# Altium PCB PCB1.PcbDoc (part 2 of 3)
Units mil, origin at the board's own origin, x right, y up, seen from the top; angles counter-clockwise.
Board outline 2860 x 1380 mil, 4 copper layers (L1, L2, L3, L4), stack 61.583 mil thick; 101 components, 94 nets, 397 pads, 115 vias.
Unrouted connection lines stored in the file: 102.
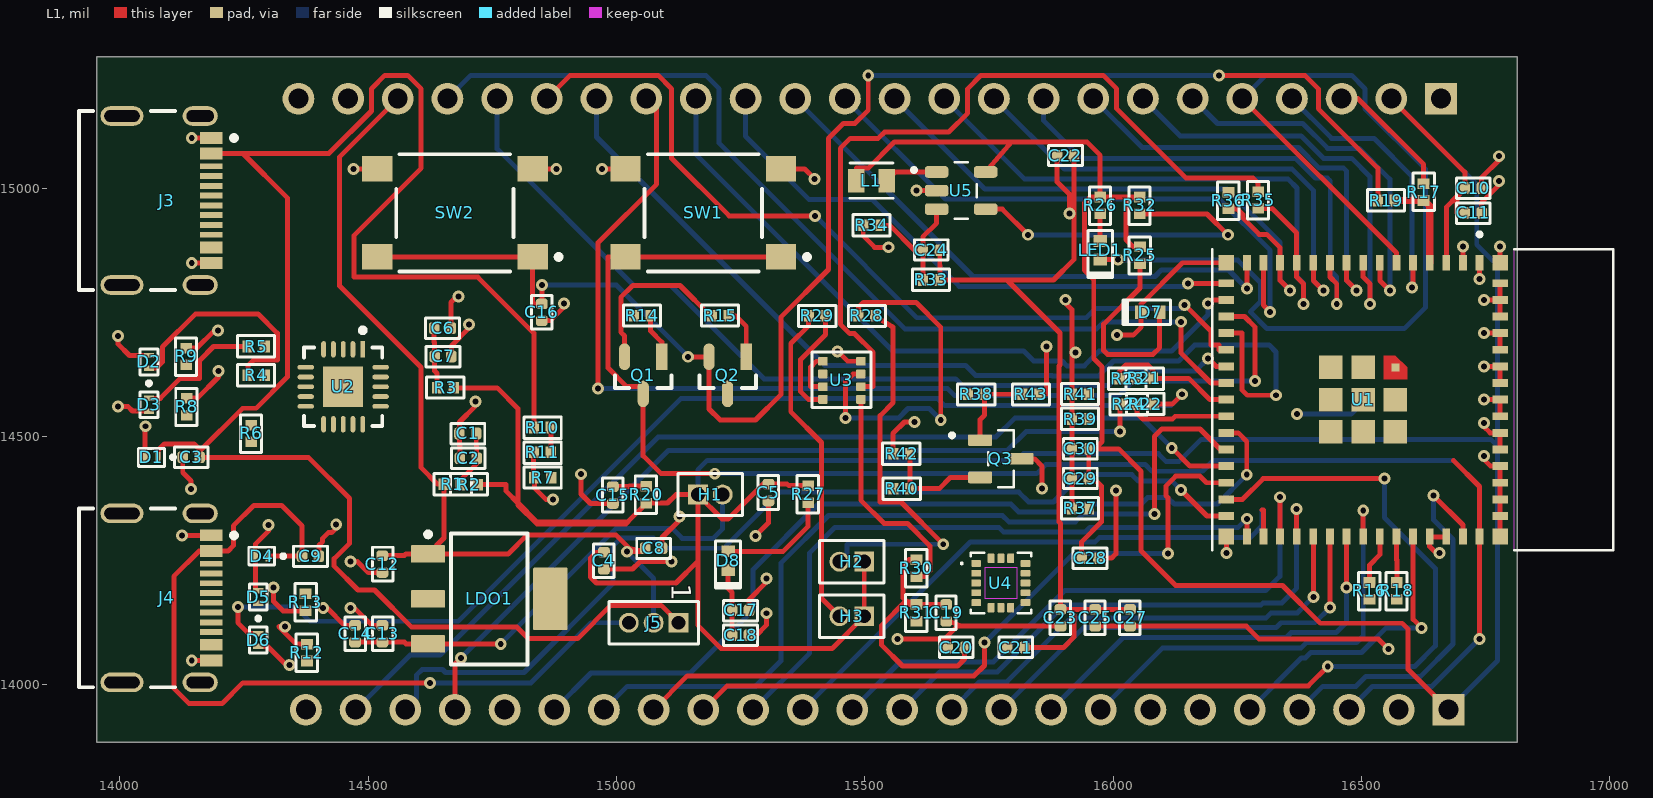
[diagram p0: L1 view]

## Part data (continued)
R10 R29: library part RC0402FR-074K7L, "RES 4.7K OHM 1% 1/16W 0402", Case Code (Imperial)=0402, Case Code (Metric)=1005, LCSC PART Number=C105871, Manufacturer=Yageo, Max Operating Temperature=155°C, Max Power Dissipation=63mW, Min Operating Temperature=-55°C, Power Rating=62.5mW, Resistance Tolerance=1%, Resistor Type="Thick Film", Supplier Part Number=3795218, Temperature Coefficient=100ppm/°C, Voltage Rating=50V, Case/Package=0402, Category="Chip SMD Resistors", ComponentLink1Description=https://datasheet.ciiva.com/7850/1018594-7850022.pdf?src-supplier=Element14, ComponentLink1URL=https://datasheet.ciiva.com/7850/1018594-7850022.pdf?src-supplier=Element14, ComponentLink2Description=https://datasheet.ciiva.com/7850/1018594-7850023.pdf?src-supplier=Element14, ComponentLink2URL=https://datasheet.ciiva.com/7850/1018594-7850023.pdf?src-supplier=Element14, ComponentLink3Description=https://datasheet.ciiva.com/22661/1686128-22661342.pdf?src-supplier=Element14, ComponentLink3URL=https://datasheet.ciiva.com/22661/1686128-22661342.pdf?src-supplier=Element14, Construction=Rectangular, Depth=0.5mm, Features="Moisture Resistant", Lead Free="Lead Free", Length=1mm, Manufacturer Part Number=RC0402FR-074K7L, Military Standard=Not, Number of Terminations=2, Packaging="Tape and Reel", Pins=2, Pricing="10000=0.0007, 50000=0.0007, 200000=0.0007, 500000=0.0007, 1250000=0.0006 (USD)", Reach SVHC Compliant=No, RoHS=Yes, RoHS Compliant=Yes, Series=RC, Stock=3880000, Supplier="Future Electronics", Termination=SMD/SMT, Tolerance=1%, Voltage Rating (AC)=50V, Voltage Rating (DC)=50V, Width=0.5mm
R25 R26 R27 R28: library part RT0402BRD071KL, "RES SMD 1K OHM 0.1% 1/16W 0402", Case Code (Imperial)=0402, Case Code (Metric)=1005, LCSC PART Number=C852624, Manufacturer=Yageo, Max Operating Temperature=155°C, Max Power Dissipation=63mW, Min Operating Temperature=-55°C, Package Quantity=10000, Power Rating=62.5mW, Supplier Part Number=4395265, Temperature Coefficient=25ppm/°C, Tolerance=0.1%, Voltage Rating=50V, Case/Package=0402, Category="Chip SMD Resistors", ComponentLink1Description=https://datasheet.ciiva.com/46635/pyu-rt-1-to-0-05-rohs-l-5-46635179.pdf?src-supplier=Digikey, ComponentLink1URL=https://datasheet.ciiva.com/46635/pyu-rt-1-to-0-05-rohs-l-5-46635179.pdf?src-supplier=Digikey, ComponentLink2Description=https://datasheet.ciiva.com/2582/pyu-rt-1-to-0-05-rohs-l-4-2582219.pdf?src-supplier=Digikey, ComponentLink2URL=https://datasheet.ciiva.com/2582/pyu-rt-1-to-0-05-rohs-l-4-2582219.pdf?src-supplier=Digikey, ComponentLink3Description=https://datasheet.ciiva.com/12837/pyu-rt-1-to-0-05-rohs-l-4-12837237.pdf?src-supplier=Mouser, ComponentLink3URL=https://datasheet.ciiva.com/12837/pyu-rt-1-to-0-05-rohs-l-4-12837237.pdf?src-supplier=Mouser, Features="Moisture Resistant", Height=0.014inch, Lead Free="Lead Free", Length=0.039inch, Manufacturer Part Number=RT0402BRD071KL, Number of Terminations=2, Packaging="Tape and Reel", Pricing="10000=0.0199, 20000=0.0196, 30000=0.0194, 40000=0.0193, 50000=0.0189 (USD)", RoHS=Yes, RoHS Compliant=Yes, Series=RT, Stock=90000, Supplier="Future Electronics", Termination=SMD/SMT, Voltage Rating (DC)=50V, Weight=2.3E-05oz, Width=0.5mm
R32: library part RC0402BR-071ML, "Thick Film Resistors 1 MOhms 1/16W 0402 0.1%", Case/Package=0402, Manufacturer=Yageo, Supplier Part Number=13-RC0402BR-071MLCT-ND, Category="Chip SMD Resistors", ComponentLink1Description=https://datasheet.octopart.com/RC0402BR-071ML-Yageo-datasheet-164759695.pdf?src-supplier=Future+Electronics, ComponentLink1URL=https://datasheet.octopart.com/RC0402BR-071ML-Yageo-datasheet-164759695.pdf?src-supplier=Future+Electronics, Manufacturer Part Number=RC0402BR-071ML, Packaging="Tape and Reel", Parameter 1=C5842802, Pricing="1=0.35, 10=0.138, 100=0.1081, 1000=0.07038, 2500=0.06936, 5000=0.05508 (USD)", RoHS=Yes, RoHS Compliant=Yes, Stock=9912, Supplier=Digikey
R33 R37: library part RT0402BRD0747KL, "RES SMD 47K OHM 0.1% 1/16W 0402", Case Code (Imperial)=0402, Case Code (Metric)=1005, LCSC PART Number=C728561, Manufacturer=Yageo, Max Operating Temperature=155°C, Max Power Dissipation=63mW, Min Operating Temperature=-55°C, Power Rating=62.5mW, Supplier Part Number=4102491, Temperature Coefficient=25ppm/°C, Tolerance=0.1%, Voltage Rating=50V, Case/Package=0402, Category="Chip SMD Resistors", ComponentLink1Description=https://datasheet.ciiva.com/12798/pyu-rt-1-to-0-05-rohs-l-4-12798280.pdf?src-supplier=Mouser, ComponentLink1URL=https://datasheet.ciiva.com/12798/pyu-rt-1-to-0-05-rohs-l-4-12798280.pdf?src-supplier=Mouser, Contact Plating=Tin,Lead, Features="Moisture Resistant", Height=0.014inch, Lead Free="Lead Free", Length=0.039inch, Manufacturer Part Number=RT0402BRD0747KL, Number of Terminations=2, Packaging="Tape and Reel", Pricing="10000=0.0197, 20000=0.0194, 30000=0.0192, 40000=0.0191, 50000=0.0187 (USD)", RoHS=Yes, RoHS Compliant=Yes, Series=RT, Stock=10000, Supplier="Future Electronics", Termination=SMD/SMT, Voltage Rating (DC)=50V, Weight=2.3E-05oz, Width=0.5mm
R34: library part RC0402FR-075K62L, "RES 5.62K OHM 1% 1/16W 0402", Case Code (Imperial)=0402, Case Code (Metric)=1005, LCSC PART Number=C185406, Manufacturer=Yageo, Max Operating Temperature=155°C, Max Power Dissipation=63mW, Min Operating Temperature=-55°C, Power Rating=62.5mW, Supplier Part Number=7854490, Temperature Coefficient=100ppm/°C, Tolerance=1%, Voltage Rating=50V, Case/Package=0402, Category="Chip SMD Resistors", ComponentLink1Description=https://datasheet.ciiva.com/5558/pyu-rc0402-51-rohs-l-6-r-5558205.pdf?src-supplier=Mouser, ComponentLink1URL=https://datasheet.ciiva.com/5558/pyu-rc0402-51-rohs-l-6-r-5558205.pdf?src-supplier=Mouser, ComponentLink2Description=https://datasheet.ciiva.com/16987/pyu-rc0402-51-rohs-l-6-r-16987189.pdf?src-supplier=Future+Electronics, ComponentLink2URL=https://datasheet.ciiva.com/16987/pyu-rc0402-51-rohs-l-6-r-16987189.pdf?src-supplier=Future+Electronics, Construction=Rectangular, Depth=0.5mm, Features="Moisture Resistant", Lead Free="Lead Free", Length=1mm, Manufacturer Part Number=RC0402FR-075K62L, Military Standard=Not, Number of Terminations=2, Packaging="Tape and Reel", Pricing="10000=0.0007, 50000=0.0007, 200000=0.0006, 500000=0.0006, 1250000=0.0006 (USD)", RoHS=Yes, RoHS Compliant=Yes, Series=RC, Stock=1800000, Supplier="Future Electronics", Termination=SMD/SMT, Voltage Rating (DC)=50V
R38 R39: library part RT0402DRE0782RL, "RES SMD 82 OHM 0.5% 1/16W 0402", Case Code (Imperial)=0402, Case Code (Metric)=1005, LCSC PART Number=C854049, Manufacturer=Yageo, Max Operating Temperature=155°C, Max Power Dissipation=63mW, Min Operating Temperature=-55°C, Package Quantity=1, Supplier Part Number=311-82UTR-ND, Temperature Coefficient=50ppm/°C, Tolerance=0.5%, Voltage Rating (DC)=50V, Case/Package=0402, Category="Chip SMD Resistors", ComponentLink1Description=https://www.yageo.com/upload/media/product/productsearch/datasheet/rchip/PYu-RT_1-to-0.01_RoHS_L_12.pdf?src-supplier=Digikey, ComponentLink1URL=https://www.yageo.com/upload/media/product/productsearch/datasheet/rchip/PYu-RT_1-to-0.01_RoHS_L_12.pdf?src-supplier=Digikey, ComponentLink2Description=http://www.yageo.com/documents/recent/PYu-RT_1-to-0.01_RoHS_L_8.pdf?src-supplier=Digikey, ComponentLink2URL=http://www.yageo.com/documents/recent/PYu-RT_1-to-0.01_RoHS_L_8.pdf?src-supplier=Digikey, Features="Moisture Resistant", Height=0.014inch, Lead Free="Lead Free", Length=0.039inch, Manufacturer Part Number=RT0402DRE0782RL, Number of Terminations=2, Packaging="Cut Tape", Pricing="10000=0.0203 (USD)", RoHS=Yes, RoHS Compliant=Yes, Series=RT, Supplier=Digikey, Width=0.02inch
R40: library part RC0402FR-7W100RL, "RES 100 OHM 1% 1/8W 0402", Case/Package=343Case, LCSC PART Number=C606168, Manufacturer=Yageo, Supplier Part Number=13-RC0402FR-7W100RLCT-ND, Category="Chip SMD Resistors", ComponentLink1Description=https://datasheet.octopart.com/RC0402FR-7W100RL-Yageo-datasheet-164759695.pdf?src-supplier=Future+Electronics, ComponentLink1URL=https://datasheet.octopart.com/RC0402FR-7W100RL-Yageo-datasheet-164759695.pdf?src-supplier=Future+Electronics, Manufacturer Part Number=RC0402FR-7W100RL, Packaging=10Packaging, Pricing="1=0.1, 10=0.013, 100=0.0071, 1000=0.00408, 2500=0.00306 (USD)", RoHS=Yes, RoHS Compliant=Yes, Stock=5227, Supplier=Digikey
R41: library part CRGCQ0402F22K, "RES 22K OHM 1% 1/16W 0402", Case/Package=0402, LCSC PART Number=C2073567, Manufacturer="TE Connectivity", Max Operating Temperature=155°C, Max Power Dissipation=63mW, Min Operating Temperature=-55°C, Operating Supply Voltage=50V, Power Rating=62.5mW, Ratings=AEC-Q200, Supplier Part Number=73AC8868, Temperature Coefficient=100ppm/°C, Tolerance=1%, Category="Chip SMD Resistors", ComponentLink1Description=http://datasheet.octopart.com/CRGCQ0402F22K-TE-Connectivity-datasheet-114679081.pdf?src-supplier=Digikey, ComponentLink1URL=http://datasheet.octopart.com/CRGCQ0402F22K-TE-Connectivity-datasheet-114679081.pdf?src-supplier=Digikey, ComponentLink2Description=https://4donline.ihs.com/images/VipMasterIC/IC/TYEL/TYEL-S-A0004929575/TYEL-S-A0004929575-1.pdf?hkey=52A5661711E402568146F3353EA87419&src-supplier=Farnell, ComponentLink2URL=https://4donline.ihs.com/images/VipMasterIC/IC/TYEL/TYEL-S-A0004929575/TYEL-S-A0004929575-1.pdf?hkey=52A5661711E402568146F3353EA87419&src-supplier=Farnell, ComponentLink3Description=http://datasheet.octopart.com/CRGCQ0402F22K-TE-Connectivity-datasheet-114679081.pdf?src-supplier=Avnet, ComponentLink3URL=http://datasheet.octopart.com/CRGCQ0402F22K-TE-Connectivity-datasheet-114679081.pdf?src-supplier=Avnet, ComponentLink4Description=http://datasheet.octopart.com/CRGCQ0402F22K-TE-Connectivity-datasheet-114679081.pdf?src-supplier=Mouser, ComponentLink4URL=http://datasheet.octopart.com/CRGCQ0402F22K-TE-Connectivity-datasheet-114679081.pdf?src-supplier=Mouser, ComponentLink5Description=http://datasheet.octopart.com/CRGCQ0402F22K-TE-Connectivity-datasheet-114679081.pdf?src-supplier=Onlinecomponents.com, ComponentLink5URL=http://datasheet.octopart.com/CRGCQ0402F22K-TE-Connectivity-datasheet-114679081.pdf?src-supplier=Onlinecomponents.com, ComponentLink6Description=https://4donline.ihs.com/images/VipMasterIC/IC/TYEL/TYEL-S-A0004929575/TYEL-S-A0004929575-1.pdf?hkey=52A5661711E402568146F3353EA87419&src-supplier=Newark, ComponentLink6URL=https://4donline.ihs.com/images/VipMasterIC/IC/TYEL/TYEL-S-A0004929575/TYEL-S-A0004929575-1.pdf?hkey=52A5661711E402568146F3353EA87419&src-supplier=Newark, ComponentLink7Description=http://datasheet.octopart.com/CRGCQ0402F22K-TE-Connectivity-datasheet-114679081.pdf?src-supplier=Newark, ComponentLink7URL=http://datasheet.octopart.com/CRGCQ0402F22K-TE-Connectivity-datasheet-114679081.pdf?src-supplier=Newark, ComponentLink8Description=http://datasheet.octopart.com/CRGCQ0402F22K-TE-Connectivity-datasheet-114679081.pdf?src-supplier=Heilind+Electronics, ComponentLink8URL=http://datasheet.octopart.com/CRGCQ0402F22K-TE-Connectivity-datasheet-114679081.pdf?src-supplier=Heilind+Electronics, ComponentLink9Description=http://datasheet.octopart.com/CRGCQ0402F22K-TE-Connectivity-datasheet-114679081.pdf?src-supplier=Sager+Electronics, ComponentLink9URL=http://datasheet.octopart.com/CRGCQ0402F22K-TE-Connectivity-datasheet-114679081.pdf?src-supplier=Sager+Electronics, ComponentLink10Description=http://datasheet.octopart.com/CRGCQ0402F22K-TE-Connectivity-datasheet-114679081.pdf?src-supplier=Interstate+Connecting+Components, ComponentLink10URL=http://datasheet.octopart.com/CRGCQ0402F22K-TE-Connectivity-datasheet-114679081.pdf?src-supplier=Interstate+Connecting+Components, ComponentLink11Description=http://datasheet.octopart.com/CRGCQ0402F22K-TE-Connectivity-datasheet-114679081.pdf?src-supplier=Electro+Sonic, ComponentLink11URL=http://datasheet.octopart.com/CRGCQ0402F22K-TE-Connectivity-datasheet-114679081.pdf?src-supplier=Electro+Sonic, ComponentLink12Description=https://datasheet.octopart.com/CRGCQ0402F22K-TE-Connectivity-datasheet-114679081.pdf?src-supplier=Master+Electronics, ComponentLink12URL=https://datasheet.octopart.com/CRGCQ0402F22K-TE-Connectivity-datasheet-114679081.pdf?src-supplier=Master+Electronics, ComponentLink13Description=http://datasheet.octopart.com/CRGCQ0402F22K-TE-Connectivity-datasheet-114679081.pdf?src-supplier=TME, ComponentLink13URL=http://datasheet.octopart.com/CRGCQ0402F22K-TE-Connectivity-datasheet-114679081.pdf?src-supplier=TME, Features="Moisture Resistant,Automotive AEC-Q200", Height=400um, Manufacturer Part Number=CRGCQ0402F22K, Number of Terminations=2, Packaging="Cut Tape", Pricing="1=0.049, 25=0.014, 100=0.007, 250=0.006, 1000=0.005 (USD)", RoHS=Yes, RoHS Compliant=Yes, Series=CRGCQ, Stock=20000, Supplier=Avnet, Voltage Rating=50V, Voltage Rating (DC)=50V
R42: library part RC0402FR-7W100KL, "RES 100K OHM 1% 1/8W 0402", Case/Package=0402, LCSC PART Number=C606167, Manufacturer=Yageo, Supplier Part Number=13-RC0402FR-7W100KLCT-ND, Category="Chip SMD Resistors", Manufacturer Part Number=RC0402FR-7W100KL, Packaging="Tape and Reel", Pricing="1=0.1, 10=0.021, 100=0.0112, 1000=0.00612, 2500=0.0051, 5000=0.00443 (USD)", RoHS=Yes, RoHS Compliant=Yes, Stock=9078, Supplier=Digikey
R43: library part RT0402DRE0751RL, "RES SMD 51 OHM 0.5% 1/16W 0402", Case Code (Imperial)=0402, Case Code (Metric)=1005, LCSC PART Number=C853981, Manufacturer=Yageo, Max Operating Temperature=155°C, Max Power Dissipation=63mW, Min Operating Temperature=-55°C, Supplier Part Number=311-51UCT-ND, Temperature Coefficient=50ppm/°C, Tolerance=0.5%, Voltage Rating (DC)=50V, Case/Package=0402, Category="Chip SMD Resistors", ComponentLink1Description=https://www.yageo.com/upload/media/product/productsearch/datasheet/rchip/PYu-RT_1-to-0.01_RoHS_L_11.pdf?src-supplier=Digikey, ComponentLink1URL=https://www.yageo.com/upload/media/product/productsearch/datasheet/rchip/PYu-RT_1-to-0.01_RoHS_L_11.pdf?src-supplier=Digikey, ComponentLink2Description=http://www.yageo.com/documents/recent/PYu-RT_1-to-0.01_RoHS_L_9.pdf?src-supplier=Digikey, ComponentLink2URL=http://www.yageo.com/documents/recent/PYu-RT_1-to-0.01_RoHS_L_9.pdf?src-supplier=Digikey, ComponentLink3Description=https://datasheet.octopart.com/RT0402DRE0751RL-Yageo-datasheet-169971040.pdf?src-supplier=Future+Electronics, ComponentLink3URL=https://datasheet.octopart.com/RT0402DRE0751RL-Yageo-datasheet-169971040.pdf?src-supplier=Future+Electronics, Lead Free="Lead Free", Manufacturer Part Number=RT0402DRE0751RL, Number of Terminations=2, Packaging="Cut Tape", Pricing="1=0.1, 10=0.051, 50=0.0494, 100=0.0479, 500=0.03672, 1000=0.03264 (USD)", RoHS=Yes, RoHS Compliant=Yes, Series=RT, Stock=1712, Supplier=Digikey
SW1 SW2: library part PTS645SH50SMTR92LFS, "SWITCH TACTILE SPST-NO 0.05A 12V", Case/Package=SMD/SMT, Color=Black, Contact Current Rating=50mA, Contact Resistance=100mR, LCSC PART Number=C221869, Manufacturer="ITT C&K", Max Operating Temperature=60°C, Max Voltage Rating (DC)=12V, Min Operating Temperature=-20°C, Operating Force=200gf, Package Quantity=1000, Supplier Part Number=CKN9085CT-ND, Actuator Material=Nylon,Polyamide,PA66, Actuator Type=Standard, Category="Tactile Switches", ComponentLink1Description=https://datasheet.ciiva.com/29903/getdatasheetpartid-773702-29903807.pdf?src-supplier=Verical, ComponentLink1URL=https://datasheet.ciiva.com/29903/getdatasheetpartid-773702-29903807.pdf?src-supplier=Verical, ComponentLink2Description=https://datasheet.ciiva.com/14920/pts645-14920741.pdf?src-supplier=Digikey, ComponentLink2URL=https://datasheet.ciiva.com/14920/pts645-14920741.pdf?src-supplier=Digikey, ComponentLink3Description=https://datasheet.ciiva.com/22637/1707731-22637356.pdf?src-supplier=Element14, ComponentLink3URL=https://datasheet.ciiva.com/22637/1707731-22637356.pdf?src-supplier=Element14, Contact Material=Bronze, Contact Plating=Silver, Current Rating=50mA, Depth=9mm, Illumination Type=Non-Illuminated,Illuminated, Lead Free="Lead Free", Length=6mm, Manufacturer Part Number=PTS645SH50SMTR92LFS, Max Current Rating=50mA, Mechanical Life=100000Cycles, Mounting Technology="Surface Mount", Number of Positions=2, Orientation=Straight, Packaging="Tape and Reel", Pricing="1=0.33, 10=0.285, 25=0.2692, 100=0.2476, 250=0.23404, 500=0.22418, 1000=0.21467, 2000=0.20552, 3000=0.20033, 5000=0.19395, 7000=0.18986, 10000=0.18561, 25000=0.17508, 50000=0.1675 (USD)", Reach SVHC Compliant=No, RoHS=Yes, RoHS Compliant=Yes, Series=PTS645, Stock=17094, Supplier=Digikey, Switch Function=Off-Mom, Termination="Gull Wing", Throw Configuration=SPST, Voltage Rating (DC)=12V
U1: library part ESP32-S3-MINI-1-N8, "20.5dBm ESP32-S3FN8 Chip 2.4GHz SMD WiFi Modules ROHS", LCSC PART Number=C2913206, Manufacturer="Espressif Systems", Supplier Part Number=1965-ESP32-S3-MINI-1-N8CT-ND, Category=LDO, ComponentLink1Description=https://datasheet.octopart.com/ESP32-S3-MINI-1-N8-Espressif-Systems-datasheet-165560562.pdf?src-supplier=TME, ComponentLink1URL=https://datasheet.octopart.com/ESP32-S3-MINI-1-N8-Espressif-Systems-datasheet-165560562.pdf?src-supplier=TME, Manufacturer Part Number=ESP32-S3-MINI-1-N8, Pricing="1=5.28, 10=4.566, 25=4.3196, 100=3.9802, 250=3.7768, 650=3.58103, 1300=3.44874, 1950=3.37497 (USD)", RoHS=No, Stock=12636, Supplier=Digikey
U2: "IC USB SERIAL FULL UART 20QFN", Case/Package=QFN, LCSC PART Number=C132159, Manufacturer=FTDI, Max Operating Temperature=85°C, Max Supply Voltage=5.5V, Min Operating Temperature=-40°C, Min Supply Voltage=2.97V, Operating Supply Current=8mA, Supplier Part Number=768-1128-1-ND, Category="Interface ICs", ComponentLink1Description=https://datasheet.ciiva.com/1787/ds-ft231x-1787312.pdf?src-supplier=Digikey, ComponentLink1URL=https://datasheet.ciiva.com/1787/ds-ft231x-1787312.pdf?src-supplier=Digikey, ComponentLink2Description=https://datasheet.ciiva.com/30475/0900766b811020d3-30475405.pdf?src-supplier=Rs, ComponentLink2URL=https://datasheet.ciiva.com/30475/0900766b811020d3-30475405.pdf?src-supplier=Rs, ComponentLink3Description=https://datasheet.ciiva.com/4787/ds-ft231x-13571-4787570.pdf?src-supplier=Mouser, ComponentLink3URL=https://datasheet.ciiva.com/4787/ds-ft231x-13571-4787570.pdf?src-supplier=Mouser, ComponentLink4Description=https://datasheet.ciiva.com/1787/ft-x-series-1787313.pdf?src-supplier=Digikey, ComponentLink4URL=https://datasheet.ciiva.com/1787/ft-x-series-1787313.pdf?src-supplier=Digikey, ComponentLink5Description=https://datasheet.ciiva.com/1787/ft-x-series-1787314.pdf?src-supplier=Digikey, ComponentLink5URL=https://datasheet.ciiva.com/1787/ft-x-series-1787314.pdf?src-supplier=Digikey, Data Rate=12Mbps, Height=800um, Interface=UART,USB, Lead Free="Lead Free", Manufacturer Part Number=FT231XQ-R, Mounting Technology="Surface Mount", Number of Channels=1, Packaging="Tape and Reel", Pins=20, Pricing="1=2.34, 25=2.27, 100=2.2, 250=2, 500=1.82002, 1000=1.7625, 5000=1.7625 (USD)", RoHS=Yes, RoHS Compliant=Yes, Series="USBmadeEZ-UART, FT-X, X-Chip", Stock=41705, Supplier=Digikey, Weight=0.004339oz
U3: "SENSOR PRESSURE HUMIDITY TEMP", Case/Package=LGA, LCSC PART Number=C92489, Manufacturer="Bosch Tools", Max Operating Temperature=85°C, Min Operating Temperature=-40°C, Supplier Part Number=828-1063-1-ND, Category="Linear ICs", Lead Free="Lead Free", Manufacturer Part Number=BME280, Pins=8, Pricing="1=4.17, 5=3.734, 10=3.573, 25=3.3808, 50=3.2492, 100=3.1285, 500=2.88584, 1000=2.79544, 10000=2.5454 (USD)", RoHS=No, Stock=15872, Supplier=Digikey
U4: library part PASCO2V01BUMA1, "SENSOR CARBON DIOXIDE I2C OUTPUT", LCSC PART Number=C6352077, Manufacturer=Infineon, Supplier Part Number=726-PASCO2V01BUMA1, Manufacturer Part Number=PASCO2V01BUMA1, Pricing="1=27.8, 10=26.67, 50=25.34, 100=24.46, 1000=23.66, 10000=23.66 (USD)", RoHS=No, Stock=274, Supplier=Mouser
U5: library part LMR62421XMFX/NOPB, "IC REG BST SEPIC ADJ 2.1A SOT23", Case/Package=SOT-23-5, LCSC PART Number=C544413, Manufacturer="TI National Semiconductor", Max Operating Temperature=125°C, Max Output Voltage=24V, Max Supply Voltage=5.5V, Min Input Voltage=2.7V, Min Operating Temperature=-40°C, Output Current=2.1A, Package Quantity=3000, Quiescent Current=7mA, Supplier Part Number=926-LMR62421XMFXNOPB, Switching Frequency=1.6MHz, Category="Voltage Regulators - Switching", ComponentLink1Description=https://datasheet.ciiva.com/4880/snvs734a-74088-4880547.pdf?src-supplier=Mouser, ComponentLink1URL=https://datasheet.ciiva.com/4880/snvs734a-74088-4880547.pdf?src-supplier=Mouser, Height=1.45mm, Lead Free="Lead Free", Length=2.9mm, Manufacturer Part Number=LMR62421XMFX/NOPB, Min Output Voltage=2.7V, Mounting Technology="Surface Mount", Number of Channels=1NUMBER, Number of Outputs=1, Output Configuration=Positive, Output Type=Adjustable, Output Voltage=24V, Packaging="Tape and Reel", Pins=5, Pricing="1=1.29, 10=0.938, 50=0.85, 100=0.753, 1000=0.627, 10000=0.583 (USD)", RoHS=Yes, RoHS Compliant=Yes, Series="SIMPLE SWITCHER®", Stock=3949, Supplier=Mouser, Synchronous Rectifier=No, Thickness=1.2mm, Topology=Boost,SEPIC, Width=1.6mm

## Via types
v1: diameter 24, hole 12, L1 to L4, 114 vias
v2: diameter 24/24 (per signal layer), hole 12, L1 to L4, 1 vias

## Nets (pads, with @x,y where several pads share a name; then routed paths per layer and width w, separated by ;. In a path a pad name is that pad's centre, name@x,y a point inside that pad or via, vN(x,y) a via of type N, cw(c..) or ccw(c..) an arc to the next point about the centre after c; other vN are vias at no path point)
12V: C21.2 C22.2 C23.2 C24.2 C25.2 C27.2 R33.2 U4.10 | length 1574.5
  L1 w10: C24.2@15650.93,14875.01 15650.93,14844.08 15651.01,14844 R33.2@15651.01,14815.01 15786.35,14815.01 ; C21.2@15820.93,14075.01 15900,14075.01 15921,14096.01 15921,14140.94 15910,14151.94 ; C22.2@15920.93,15065.01 15920.93,14855.94 15880,14815.01 15786.35,14815.01 ; C27.2@16034,14151.94 C25.2@15964,14151.94 15910,14151.94 ; 15786.35,14815.01 15893,14708.36 15893,14644 15891,14642 15891,14328 15894,14325 C23.2@15894,14151.94 15910,14151.94